# Altium PCB NaiS6202HD_0.7 - Copy.PcbDoc (part 1 of 2)
Units mm, origin at the board's own origin, x right, y up, seen from the top; angles counter-clockwise.
Board outline 60 x 38 mm, 4 copper layers (Top, INT1, GND, Bottom), stack 0.965 mm thick; 148 components, 224 nets, 688 pads, 377 vias.
Unrouted connection lines stored in the file: 231.
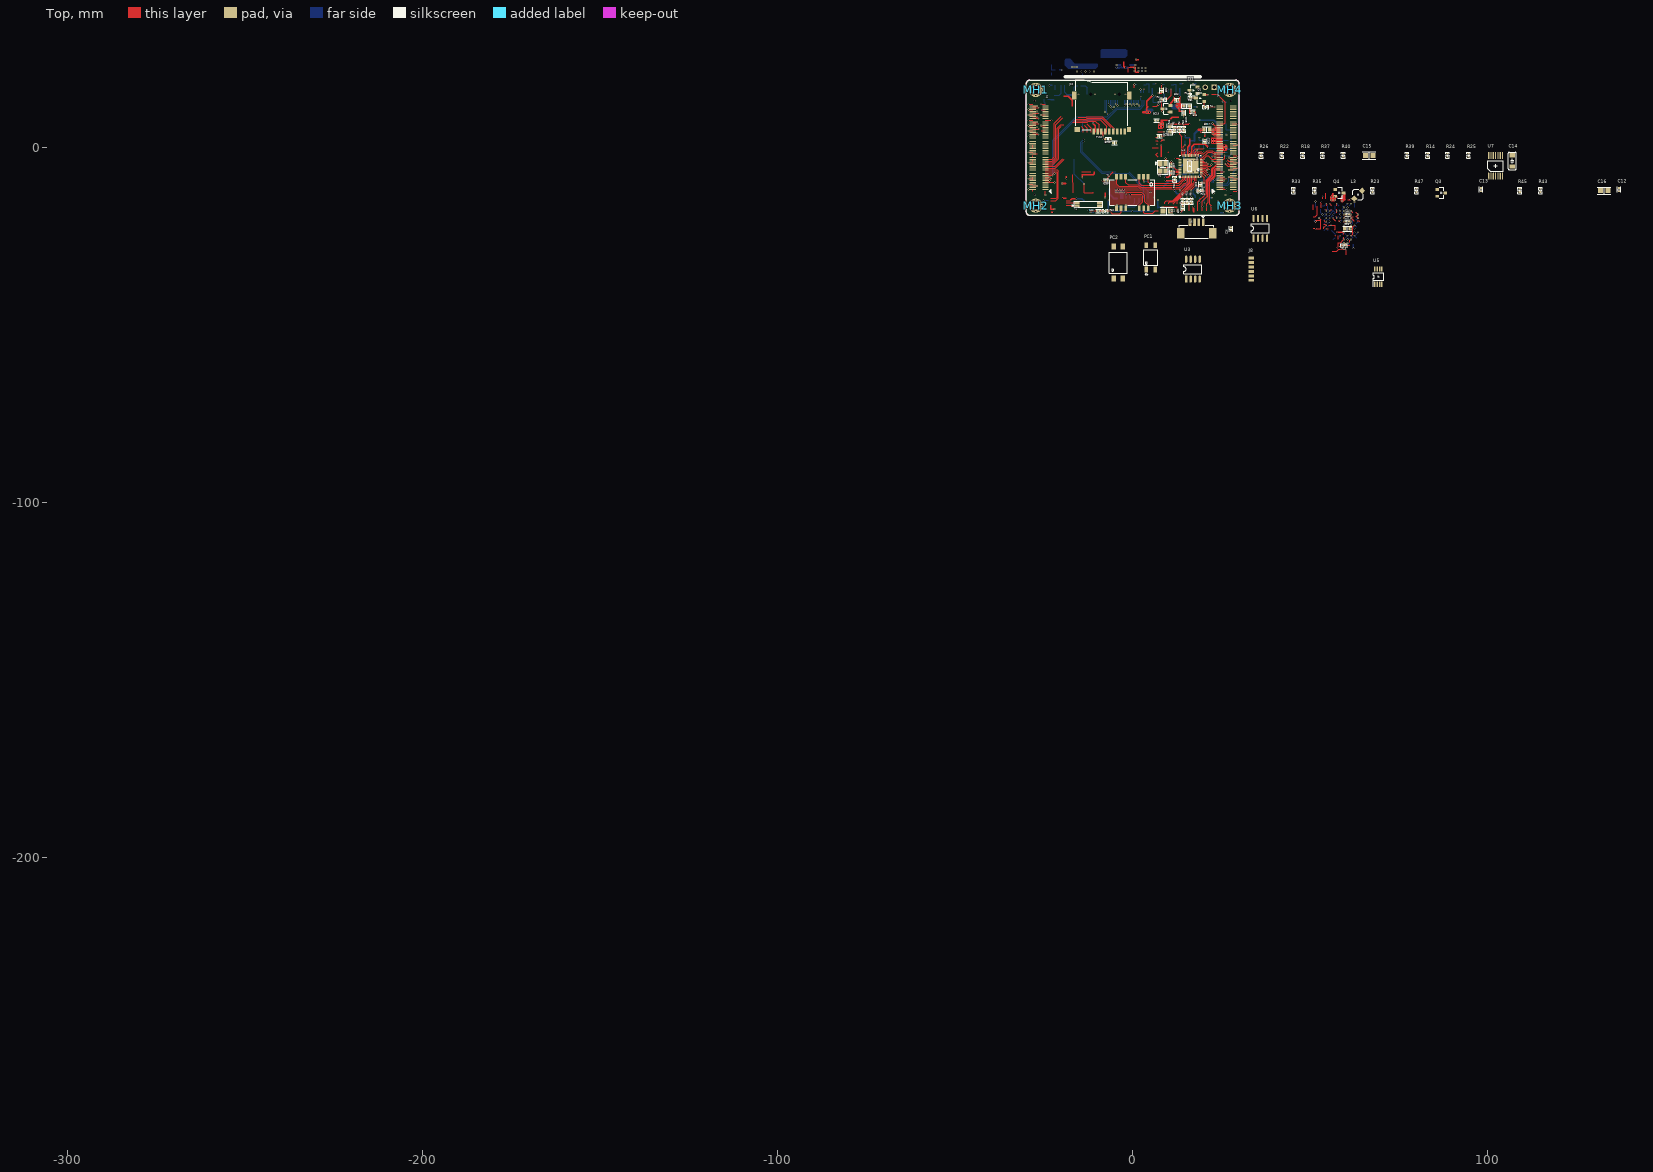
[diagram p0: Top view]
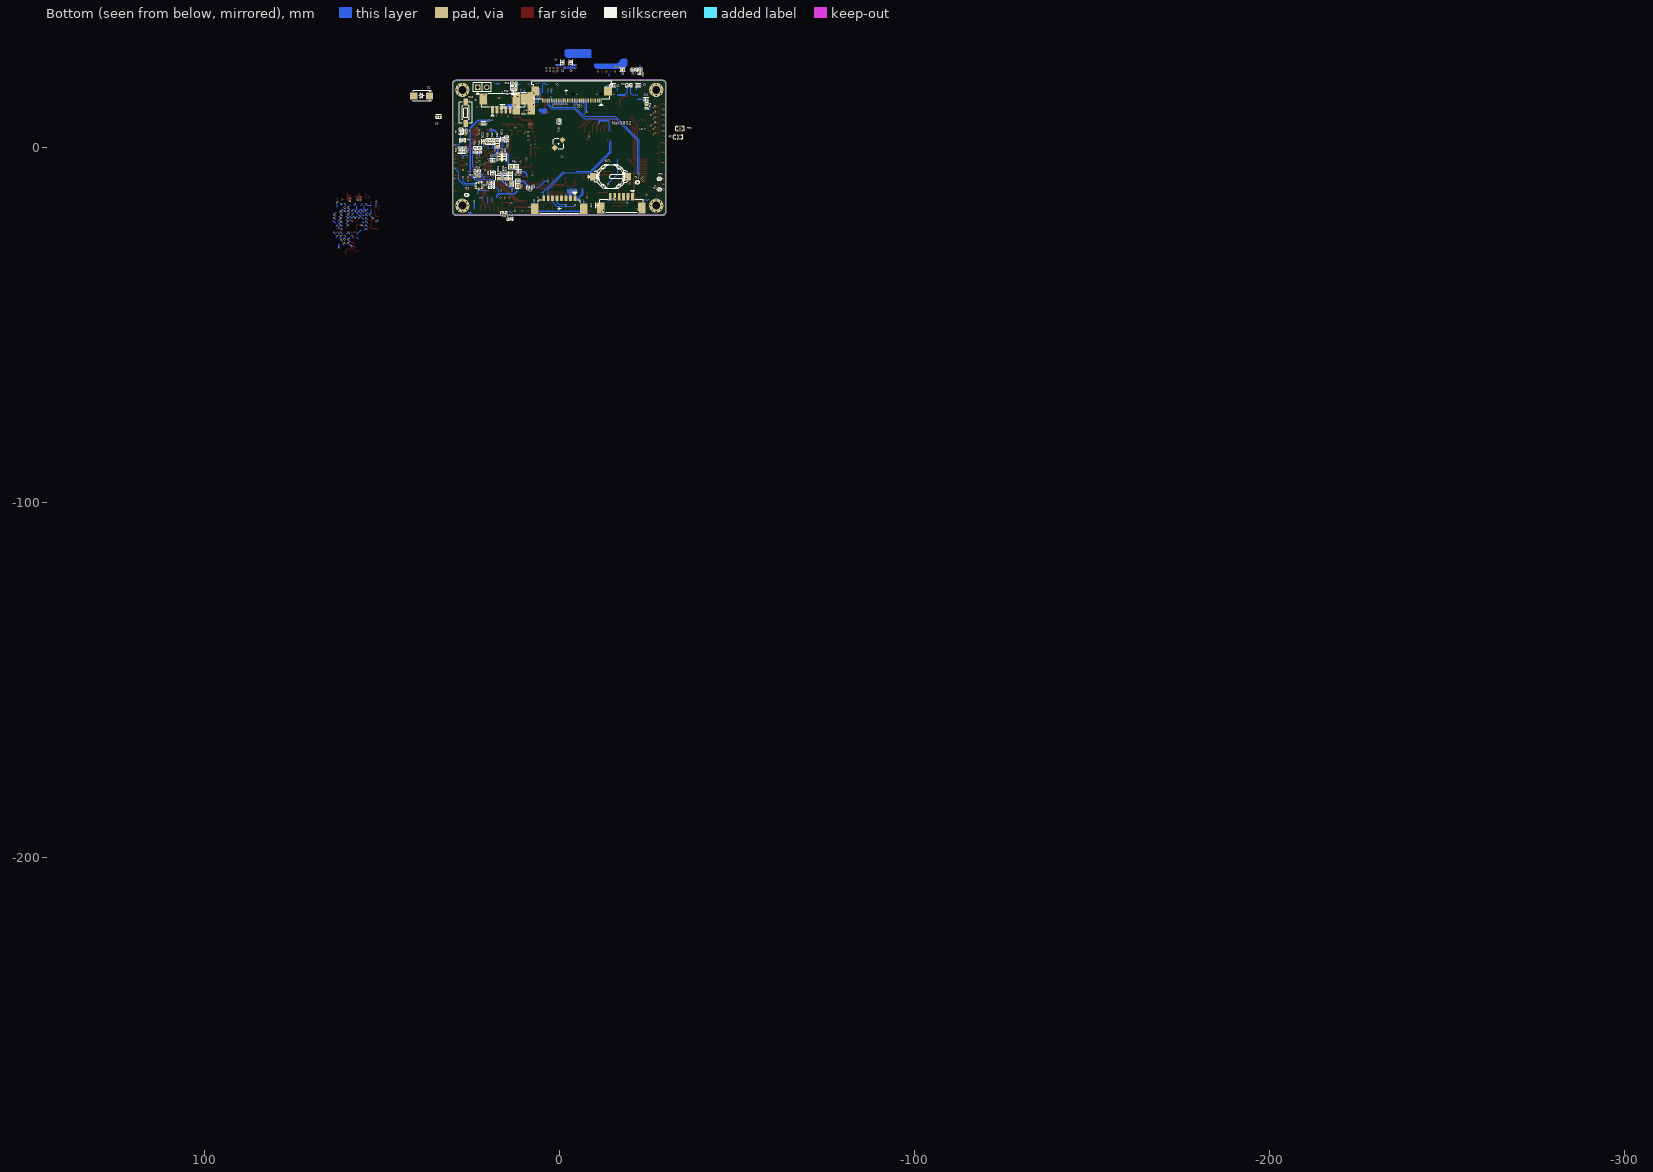
[diagram p1: Bottom view, seen from below]
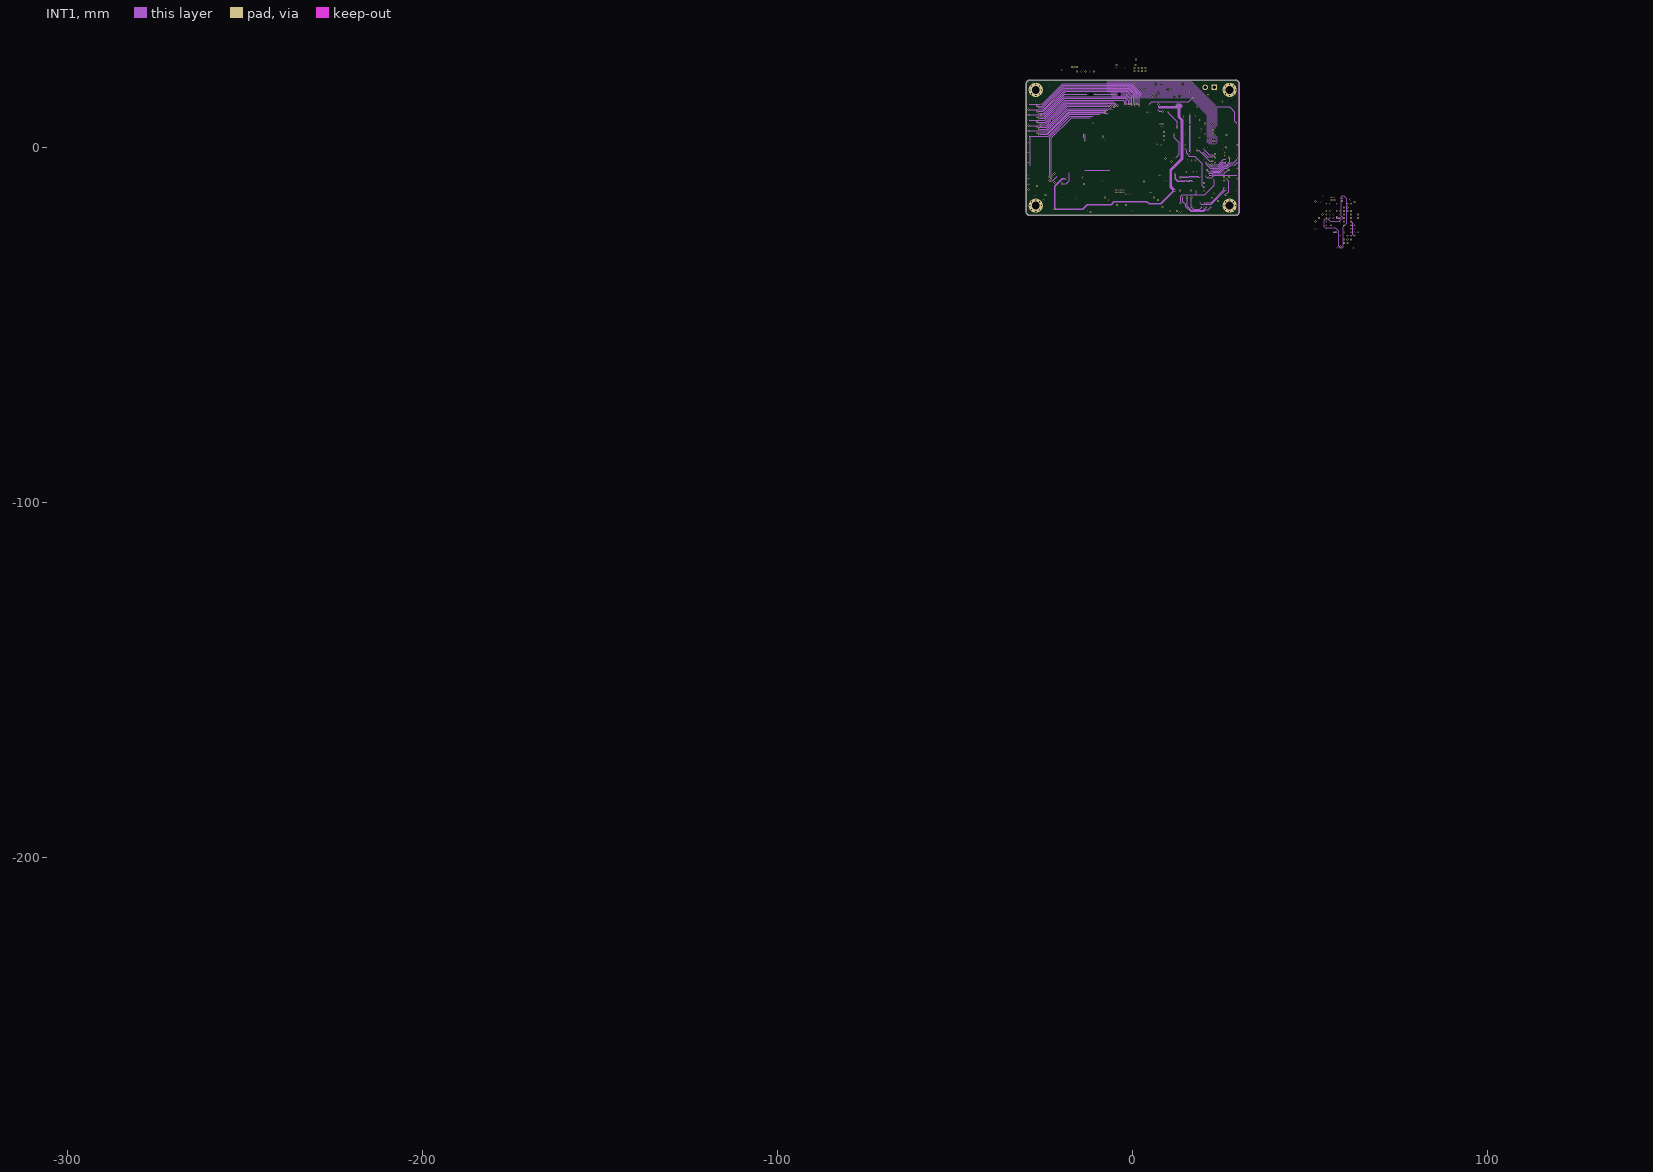
[diagram p2: INT1]
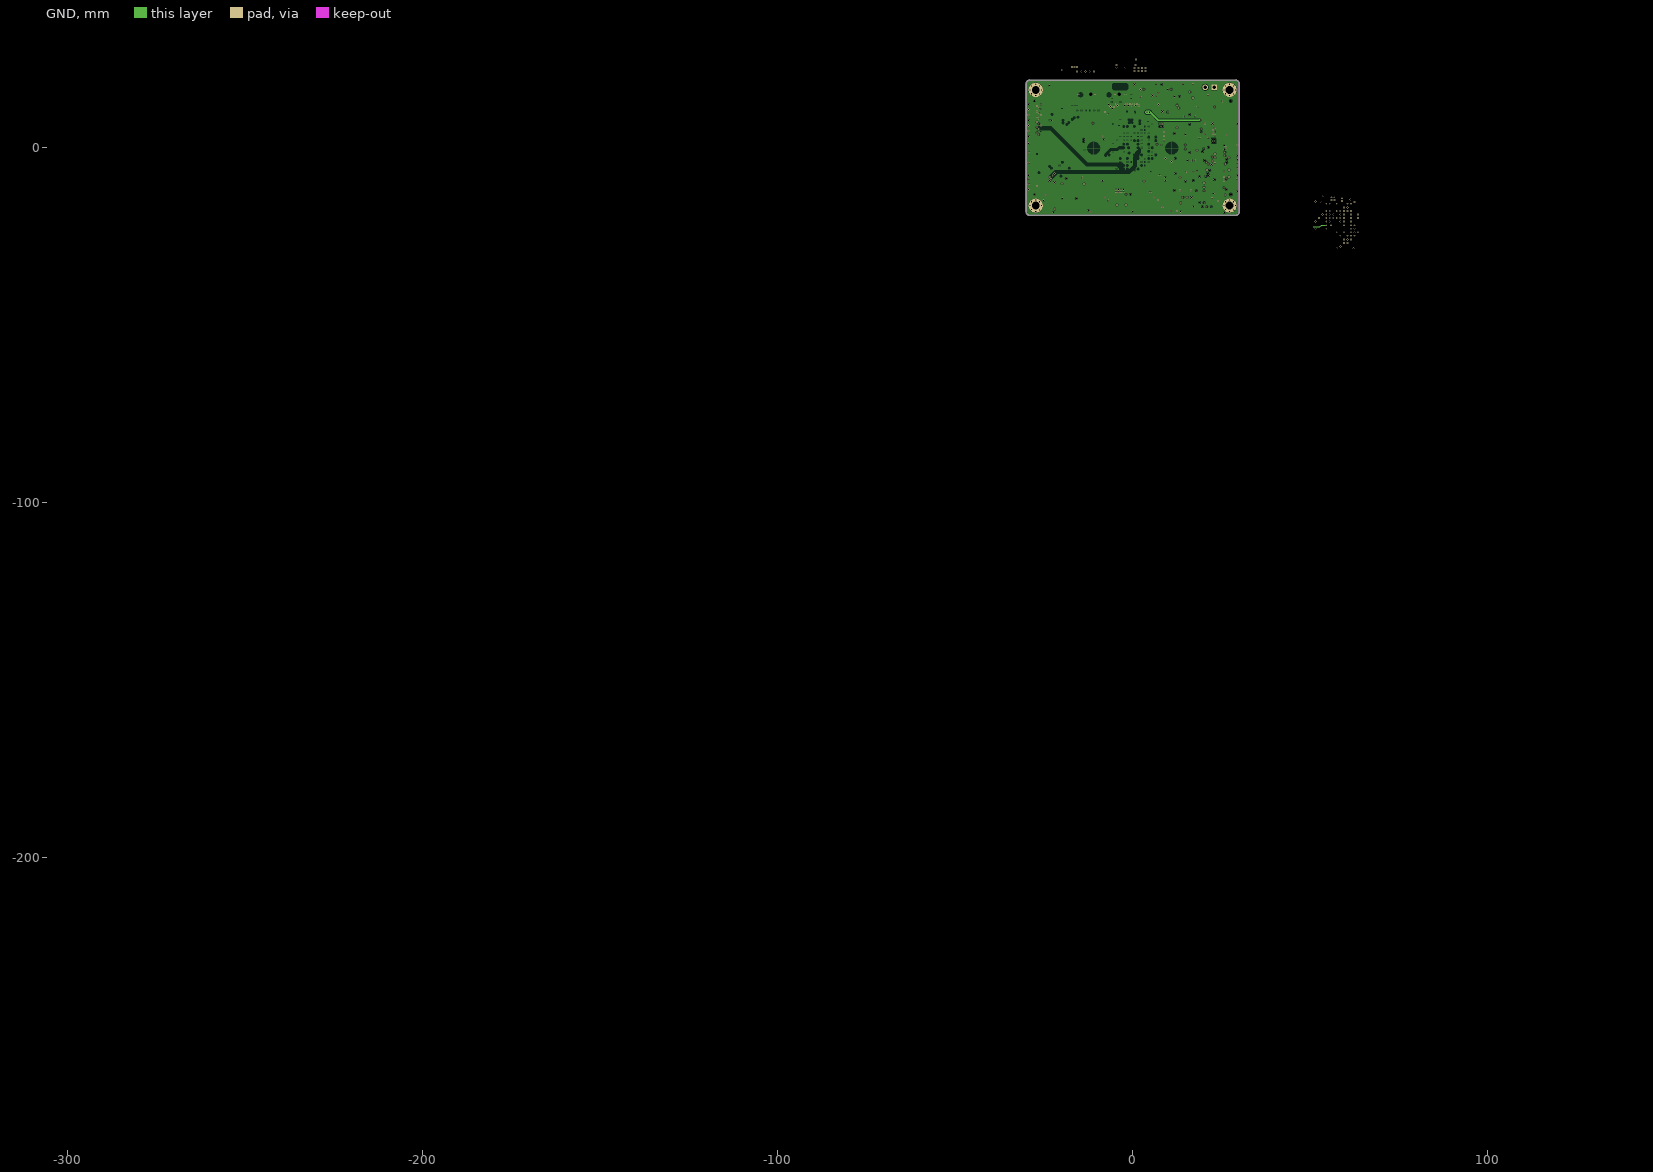
[diagram p3: GND]

## Layer stack, top to bottom
Solder Mask Top: solder mask 0.0102, Solder Resist, Dk 3.5
Top: signal copper 0.0343
Dielectric 1: dielectric 0.254, FR-4, Dk 4.3
INT1: signal copper 0.0343
Dielectric2: dielectric 0.254, FR-4, Dk 4.3
GND: signal copper 0.0343
Dielectric4: dielectric 0.32, FR-4, Dk 4.8
Bottom: signal copper 0.0343
Solder Mask Bottom: solder mask 0.0102, Solder Resist, Dk 3.5

## Board outline
-30,-18 -30,18 cw(c-29,18) -29,19 28.994,19 cw(c28.994,18) 29.994,18 30,18 30,-18 29.994,-18 cw(c28.994,-18) 28.994,-19 -29,-19 cw(c-29,-18)

## Design rules (kind name [scope] priority, off if disabled: settings)
AssemblyTestPointUsage [All] p1 off:
AssemblyTestpoint [All] p1 off: testpointundercomponent=TRUE minsize=1.016 maxsize=2.54 preferedsize=1.524 minholesize=0 maxholesize=1.016 preferedholesize=0.813 testpointgrid=0.025 usegrid=TRUE gridtolerance=0 allowsidetop=TRUE allowsidebottom=TRUE
Clearance Clearance_6 [InNet('+12V') or InNet('N21617464') or InNet('+5.0V')  or InNet('+3.3V') vs IsFill] p1: gap=0.4
Clearance Clearance_4 [InComponent('MH1') OR InComponent('MH2') OR InComponent('MH3') OR InComponent('MH4') or INnet('GND') vs OnLayer('Keep-Out Layer')] p2: gap=0
Clearance Clearance_3 [InComponent('U4') or InComponent('RP1') or InComponent('RP2') or  HasFootprint('CS-0603')] p3: gap=0.127
Clearance Clearance_2 [OnLayer('Keep-Out Layer') vs InNet('GND')] p4: gap=0.1
Clearance Clearance_1 [IsVia] p5: gap=0.1
Clearance [All] p6: gap=0.2
ComponentClearance ComponentClearance_1 [InComponent('J7') or InComponent('J5') or InComponent('J3') or InComponent('U18') or InComponent('U1') or Incomponent('J10') vs InComponent('U19') or InComponent('D2')  or InComponent('L6') or InComponent('L2') or InComponent('LD1') or InComponent('LD2') or InComponent('LD3') or InComponent('LD4') or InComponent('FB11') or InComponent('BC14') or InComponent('U17') or InComponent('OSC1') or InComponent('U11')  or  InComponent('U8') or InComponent('BC25') or InComponent('C24') or InComponent('C31') or InComponent('BC18') or InComponent('R55') or InComponent('C27') or InComponent('BC20') or InComponent('FB12') or InComponent('C25') or InComponent('C26') or InComponent('R56') or InComponent('R20') or InComponent('R19') or InComponent('R53') or InComponent('R54') or InComponent('R21') or InComponent('R18') or InComponent('FB4')  or Incomponent('C35') or Incomponent('TVS1') or InComponent('C36') or InComponent('FB2') or InComponent('BC7')] p1: gap=-10 collisioncheckmode=3 verticalgap=0.254 showdistances=FALSE
ComponentClearance [All] p2: gap=0.01 collisioncheckmode=3 verticalgap=0 showdistances=FALSE
DiffPairsRouting [All] p1 off: maxlimit=0.254 minlimit=0.2 mostfreqgap=0.254 toplayer_prefgap=0.2 toplayer_minwidth=0.2 toplayer_maxwidth=0.381 toplayer_prefwidth=0.254 midlayer1_mingap=0.254 midlayer1_minwidth=0.381 midlayer1_maxwidth=0.381 midlayer1_prefwidth=0.381 midlayer2_mingap=0.254 midlayer2_minwidth=0.381 midlayer2_maxwidth=0.381 midlayer2_prefwidth=0.381 bottomlayer_prefgap=0.2 bottomlayer_minwidth=0.2 bottomlayer_maxwidth=0.381 bottomlayer_prefwidth=0.254 maxuncoupledlength=12.7
FabricationTestPointUsage [All] p1 off: valid=0 allowmultiple=FALSE
FabricationTestpoint [All] p1 off: side=3 testpointundercomponent=TRUE minsize=1.016 maxsize=2.54 preferedsize=1.524 minholesize=0 maxholesize=1.016 preferedholesize=0.813 testpointgrid=0.025 allowsidetop=TRUE allowsidebottom=TRUE usegrid=TRUE gridtolerance=0
FanoutControl Fanout_BGA [IsBGA] p1 off: bgadir=Out bgaviamode=Centered fanoutstyle=Auto fanoutdirection=Alternating viagrid=0.025 // Fanout_BGA (Default Rule)
FanoutControl Fanout_SOIC [IsSOIC] p3 off: bgadir=Out bgaviamode=Centered fanoutstyle=Auto fanoutdirection=Alternating viagrid=0.025 // Fanout_SOIC (Default Rule)
FanoutControl Fanout_Small [(CompPinCount < 5)] p4 off: bgadir=Out bgaviamode=Centered fanoutstyle=Auto fanoutdirection=OutThenIn viagrid=0.025 // Fanout_Small (Default Rule)
FanoutControl Fanout_Default [All] p5 off: bgadir=Out bgaviamode=Centered fanoutstyle=Auto fanoutdirection=Alternating viagrid=0.025 // Fanout_Default (Default Rule)
Height [All] p1 off: minheight=0 maxheight=25.4 prefheight=12.7
HoleSize [All] p1: absolutevalues=TRUE maxlimit=5 minlimit=0.25 maxpercent=80.000 minpercent=20.000
HoleToHoleClearance [All] p1: gap=0.2 allowstackedmicrovias=TRUE
MinimumSolderMaskSliver [All] p1: minsoldermaskwidth=0
PasteMaskExpansion [All] p1 off: expansion=0
PermittedLayers [All] p1 off: toplayerpermitted=TRUE bottomlayerpermitted=TRUE
PlaneClearance [InNet('GND')] p1 off: clearance=0.508
PlaneConnect [All] p1 off: planeconnectstyle=Direct reliefexpansion=0.508 reliefentries=4 reliefconductorwidth=0.254 reliefairgap=0.254
PolygonConnect [All] p1 off: connectstyle=Direct reliefconductorwidth=0.254 reliefentries=4 polygonreliefangle="90 Angle" airgapwidth=0.1
RoutingVias [All] p1: holewidth=0.25 width=0.5 viastyle="Through Hole" minholewidth=0.25 minwidth=0.5 maxholewidth=0.25 maxwidth=0.5
ShortCircuit [All] p1 off: allowed=FALSE
SilkToSilkClearance [All] p1: silktosilkclearance=0
SilkToSolderMaskClearance [IsPad] p1: minsilkscreentomaskgap=0 clearancetoexposedcopper=TRUE
SolderMaskExpansion [All] p1: expansion=0.102
Width Width_1 [(InNet('VDD_3.3V') OR InNet('AVDD') OR InNet('OVDD') OR InNet('DVDD'))] p1: maxlimit=2 minlimit=0.2 preferedwidth=2
Width [All] p2: maxlimit=1 minlimit=0.1 preferedwidth=0.2
9 further rules are at their usual default settings.

## Components (designator, comment, footprint, x,y, rotation, side; value= is the part's Value field where it differs from the comment)
BAT1 "CN048S-0005//SMD_BAT_HOLDER" BAT-CN048S -14.416,-8.163 r90 bottom
BC1 "0.1uF" CS-1005 14.127,-17 r270 top
BC2 "0.1uF" CS-1005 8.173,16.15 r90 top
BC3 "0.1uF" CS-1005 12.4,13.5 r0 top
BC4 "10uF" CS-1608 16.663,-2.553 r270 bottom
BC5 "10uF" CS-1608 15.5,-2.549 r270 bottom
BC6 "0.1uF" CS-1005 16.8,10.2 r0 top
BC7 "0.1uF" CS-1005 13.3,-10.25 r270 bottom
BC8 "0.1uF" CS-1005 18.818,-7.049 r90 bottom
BC9 "10uF" CS-1608 13.9,-7.949 r90 bottom
BC10 "0.1uF" CS-1005 21.3,1.7 r90 bottom
BC11 "0.1uF" CS-1005 20.381,1.827 r90 top
BC12 "0.1uF" CS-1005 18.8,-3.549 r180 bottom
BC13 "0.1uF" CS-1005 16,2.4 r90 bottom
BC14 "0.1uF" CS-1005 11.4,-6.7 r180 bottom
BC15 "10uF" CS-1608 15.068,-7.949 r90 bottom
BC16 "0.1uF" CS-1608 17.068,-7.949 r90 bottom
BC17 "1uF" CS-1608 20.9,5.137 r0 top
BC18 "0.1uF" CS-1005 -5.1,1.4 r0 top
BC19 "0.1uF" CS-1005 6.696,7.727 r180 top
BC20 "0.1uF" CS-1005 7.6,3.3 r180 top
BC21 "0.1uF" CS-1005 14.4,9.8 r90 top
C1 "0.1uF" CS-1005 21.4,6.8 r0 bottom
C2 "1nF/NI" CS-1005 26.4,4.6 r270 bottom
C3 "12pF" CS-1005 -15.085,17.485 r0 bottom
C4 "12pF" CS-1005 -0.894,24 r270 bottom
C5 "0.1uF" CS-1005 -3.3,24 r270 bottom
C6 "0.1uF" CS-1005 12.773,15.483 r180 bottom
C7 "0.1uF" CS-1005 16,11.6 r0 bottom
C8 "0.1uF" CS-1005 -17.85,21.9 r0 bottom
C9 "0.1uF" CS-1005 -22.2,17.564 r180 bottom
C10 "0.1uF" CS-1005 -24.4,13.6 r180 bottom
C11 "0.1uF" CS-1005 -10.8,-16.3 r270 bottom (schematic designator c11)
C12 "0.1uF" CS-1005 137.001,-11.798 r90 top
C13 "10nF" CS-1005 98.102,-11.798 r90 top
C14 "4.7uF-25V-3216" C3216 106.902,-3.698 r90 top
C15 "22uF-6.3V" CS-2012 66.602,-2.198 r0 top
C16 "22uF-6.3V" CS-2012 132.801,-12.098 r0 top
C17 "0.1uF" CS-1005 10.9,-5 r270 top
C18 "0.1uF" CS-1005 10.9,-7 r90 top
C19 "3.3nF" CS-1005 19.143,-10.292 r270 top
C20 "22pF" CS-1005 -7.5,-9.3 r180 top
C21 "22uF-6.3V" CS-2012 9.6,-17.8 r0 top
C22 "0.1uF" CS-1005 -9.7,-17.8 r180 top
C23 "22uF" CS-1608 60.486,-22.8 r0 top
C24 "2.2nF" CS-1005 60.486,-18.8 r0 top
C25 "2.2nF" CS-1005 60.486,-20.8 r0 top
C26 "1nF" CS-1005 27.7,-22.9 r270 top
D1 "BAT54A" SOT-23 17.1,16.2 r180 top
D2 "RB051L-40" SOD-106 38.8,14.6 r180 bottom
D3 "1N4148" SOD-523 34,8.7 r180 bottom
FB1 "220R" LS-1608 15.2,11.8 r0 top
FB2 "220R" LS-1608 11.7,-10.2 r90 bottom
FB3 "220R" LS-1608 17.4,1.2 r270 bottom
FB4 "220R" LS-1608 12.8,-5.349 r180 bottom
J1 "LB222-G100S-BOR" BTB2X50-050-F-SMD 26.37,0 r180 top locked
J2 "LB208-G100P-BOR" BTB2X50-050-M-SMD -26.37,0 r180 top locked
J3 "05003HR-H34E" 05003HR-H34E -2,16 r180 bottom locked
J4 "12505WS-06" 12505WS-6P -17.5,-15.4 r0 bottom
J5 "PH-2PSM//NI" PH-2PSM 21.7,17 r90 bottom
J6 "12505WR-4P" 12505WS-4P 18,-22.5 r0 top
J7 "12505WS-06" 12505WS-6P 15.7,12.2 r180 bottom
J8 "6pin 2.54mm//NI" TP_HEADER_6 33.4,-34.2 r90 top
J9 "12505WR-08" 12505WR-8P 0,-15.7 r180 bottom
J10 "112J-TXAR-R" CON_U-SD -11,4.6 r0 top locked
L1 "CDRH2D14NP-2R2NC" CDRH2D14NP 0.2,1.1 r180 bottom
L2 "CDRH5D18NP-100NC-10uH" CDRH5D18NP 10,12.5 r180 bottom
L3 "CDRH2D14NP-2R2NC" CDRH2D14NP 63.502,-13.198 r0 top
MH1 "4.04pi" VA-2.2 -27.3,16.3 r0 top locked
MH2 "4.04pi" VA-2.2 -27.3,-16.3 r0 top locked
MH3 "4.04pi" VA-2.2 27.3,-16.3 r0 top locked
MH4 "4.04pi" VA-2.2 27.3,16.3 r0 top locked
PC1 "ASSR-4118" ASSR-4118 5.1,-30.9 r0 top
PC2 "PC817" PC817 -4.1,-32.3 r90 top
Q1 "MMBT6427" SOT-23 19,14 r180 top
Q2 "MMBT6427" SOT-23 9.5,11 r180 top
Q3 "MMBT3906" SOT-23 86.902,-12.698 r0 top
Q4 "MMBT6427" SOT-23 58.202,-12.698 r0 top
R1 "2.2K" RS-1005 16.1,14.5 r90 top
R2 "0" RS-1005 8.7,13.6 r0 top
R3 "10K" RS-1005 13.2,5.2 r270 top
R4 "10K" RS-1005 20.6,11.5 r0 top
R5 "10K" RS-1005 11.7,5.2 r270 top
R6 "2.2K" RS-1005 27.2,2.1 r180 bottom
R7 "10K" RS-1005 27.7,4.6 r90 bottom
R8 "0" RS-1005 16.527,-15.073 r270 top
R9 "4.7K" RS-1005 14.127,-15.073 r270 top
R10 "4.7K" RS-1005 15.327,-15.073 r270 top
R11 "4.7K" RS-1005 -19.65,17.564 r180 bottom
R12 "4.7K" RS-1005 -22.794,21.511 r90 bottom
R13 "4.7K" RS-1005 12.773,16.703 r0 bottom
R14 "4.7K" RS-1005 83.102,-2.098 r90 top
R15 "4.7K" RS-1005 12.773,17.923 r180 bottom
R16 "4.7K" RS-1005 -24.645,11.75 r90 bottom
R17 "2.49K, 1%" RS-1005 -21.194,21.911 r180 bottom
R18 "4.7K" RS-1005 47.902,-2.098 r90 top
R19 "4.7K" RS-1005 59.486,-27.5 r0 top
R20 "40.2K" RS-1005 19,-9.9 r0 bottom
R21 "10K" RS-1005 19,-11.1 r180 bottom
R22 "4.7K" RS-1005 42.002,-2.098 r90 top
R23 "2.2K" RS-1005 67.502,-11.998 r90 top
R24 "4.7K" RS-1005 88.702,-2.098 r90 top
R25 "4.7K" RS-1005 94.602,-2.098 r90 top
R26 "0//NI" RS-1005 36.202,-2.098 r90 top
R27 "4.7K" RS-1005 23,-7.9 r180 bottom
R28 "75" RS-1005 23,-6.7 r180 bottom
R29 "75" RS-1005 27.9,-0.8 r270 bottom
R30 "100K" RS-1005 23.6,-0.6 r270 bottom
R31 "45K, 1%" RS-1005 26.7,-0.8 r270 bottom
R32 "10K, 1%" RS-1005 11.836,-8.849 r90 top
R33 "2.2K" RS-1005 45.302,-11.998 r90 top
R34 "150K, 1%" RS-1005 14.8,2.4 r270 bottom
R35 "33.3K, 1%" RS-1005 51.202,-11.998 r90 top
R36 "10K" RS-1005 20,1.7 r270 bottom
R37 "1K" RS-1005 53.502,-2.098 r90 top
R38 "330" RS-1005 18.8,1.7 r270 bottom
R39 "1K" RS-1005 77.302,-2.098 r90 top
R40 "10K" RS-1005 59.302,-2.098 r90 top
R41 "330" RS-1005 19,-12.1 r180 top
R42 "2.2K" RS-1005 22.4,-0.6 r90 bottom
R43 "10K" RS-1005 114.802,-11.998 r90 top
R44 "10K" RS-1005 13.8,-20.1 r0 bottom
R45 "100" RS-1005 109.002,-11.998 r90 top
R46 "10K" RS-1005 15.6,-18.5 r180 bottom
R47 "47" RS-1005 79.902,-11.998 r90 top
R48 "120/NI" RS-1608 10.5,5.2 r270 top
R49 "47" RS-1005 8.3,-11.3 r180 bottom
R50 "10K" RS-1005 14.4,5.2 r90 top
R52 "100" RS-1005 -7.755,-17.8 r0 top
RP1 "10K" RP-4_1005 -33.5,3 r180 bottom
RP2 "10K" RP-4_1005 -34,5.4 r180 bottom
SW1 "SW PB" SWS-CTT-1131U 26.378,9.843 r90 bottom
T1 "TRC41604NL" TRC41604NL -0.1,-12.6 r180 top
TP1 "TPS" TP_0.8_SMD -28.17,-11.75 r90 bottom
TP2 "TPS" TP_0.8_SMD -28.17,-8.75 r90 bottom
TP3 "TPS" TP_0.8_SMD 26.1,-13.3 r90 bottom
TP4 "TPS" TP_0.8_SMD -22,-9.75 r90 bottom
TVS1 "ESD5B5.0ST1G" SOD-523 -0.034,7.425 r270 bottom
TVS2 "ESD5B5.0ST1G" SOD-523 -6.9,2.4 r0 top
U1 "YT8521SH" QFN48_6x6 16.318,-5.149 r90 top
U2 "SGM4574YUQN12G/TR" UTQFN-1.8】1.8-12L 22.6,-10.7 r270 bottom
U3 "MP1482" SOIC-8 17,-34.2 r0 top
U4 "AME5253-AEVADJ" SOT-23-5P 16.068,-5.149 r90 top
U5 "DS1339U-33" TSSOP8-M 69.2,-36.3 r0 top
U6 "MAX3485ESA" SOIC-8 36,-22.7 r0 top
U7 "74HC00MTCX" TSSOP-14 102.202,-5.098 r90 top
Y1 "25MHz-S20P-SX32" SX-32 8.5,-5.5 r90 top
Y2 "32.768KHz-MC-146-7pF" XTS-MC-146 -12.5,-15.9 r0 top

## Footprints (in the part's own frame and the unit in brackets; to place one, negate y for a bottom-side part, rotate by r counter-clockwise, add the part's x,y. Pads: shape width x height; smd on the part's side, far side on the other; paste and mask are expansions set on the pad)
05003HR-H34E [mm]
  rect 0.3x1.1 smd: 1(9.75,-2.65) 2(9.25,-2.65) 3(8.75,-2.65) 4(8.25,-2.65) 5(7.75,-2.65) 6(7.25,-2.65) 7(6.75,-2.65) 8(6.25,-2.65) 9(5.75,-2.65) 10(5.25,-2.65) 11(4.75,-2.65) 12(4.25,-2.65) 13(3.75,-2.65) 14(3.25,-2.65) 15(2.75,-2.65) 16(2.25,-2.65) 17(1.75,-2.65) 18(1.25,-2.65) 19(0.75,-2.65) 20(0.25,-2.65) 21(-0.25,-2.65) 22(-0.75,-2.65) 23(-1.25,-2.65) 24(-1.75,-2.65) 25(-2.25,-2.65) 26(-2.75,-2.65) 27(-3.25,-2.65) 28(-3.75,-2.65) 29(-4.25,-2.65) 30(-4.75,-2.65) 31(-5.25,-2.65) 32(-5.75,-2.65) 33(-6.25,-2.65) 34(-6.75,-2.65)
  rect 2.184x2.413 smd: M1(11.744,-0.006) M2(-8.744,-0.006)
  silkscreen extent -9.75,-4.19 12.75,2.7
12505WR-8P [mm]
  rect 0.8x1.6 smd: 1(4.375,1.45) 2(3.125,1.45) 3(1.875,1.45) 4(0.625,1.45) 5(-0.625,1.45) 6(-1.875,1.45) 7(-3.125,1.45) 8(-4.375,1.45)
  rect 2.1x3 smd: 9(-6.925,-1.45) 10(6.925,-1.45)
  silkscreen extent -5.87,-2.85 5.87,3.12
12505WS-4P [mm]
  rect 0.8x2.1 smd: 1(1.875,1.55) 2(0.625,1.55) 3(-0.625,1.55) 4(-1.875,1.55)
  rect 2.1x3 smd: 5(-4.5,-1.55) 6(4.5,-1.55)
  silkscreen extent -4.87,-2.95 4.87,3.3
12505WS-6P [mm]
  rect 0.8x2.1 smd: 1(-3.145,-1.55) 2(-1.895,-1.55) 3(-0.625,-1.55) 4(0.625,-1.55) 5(1.895,-1.55) 6(3.145,-1.55)
  rect 2.1x3 smd: M1(-5.77,1.55) M2(5.77,1.55)
  silkscreen extent -6.14,-3.31 6.14,2.95
ASSR-4118 [mm]
  rect 1x1.6 smd: 1(-1.27,-3.4) 2(1.27,-3.4) 3(1.27,3.4) 4(-1.27,3.4)
  silkscreen extent -1.95,-4.8 1.95,2.2
BAT-CN048S [mm]
  rect 2.2x1.6 smd: 1(0,4.975) 2(0,-4.975)
  silkscreen extent -3.4,-4.85 3.4,6.25, body extent -3.39,-5.22 3.31,5.18, height 2.8
BTB2X50-050-F-SMD [mm]
  rect 1.8x0.25 smd: 1(1.9,12.25) 2(-1.9,12.25) 3(1.9,11.75) 4(-1.9,11.75) 5(1.9,11.25) 6(-1.9,11.25) 7(1.9,10.75) 8(-1.9,10.75) 9(1.9,10.25) 10(-1.9,10.25) 11(1.9,9.75) 12(-1.9,9.75) 13(1.9,9.25) 14(-1.9,9.25) 15(1.9,8.75) 16(-1.9,8.75) 17(1.9,8.25) 18(-1.9,8.25) 19(1.9,7.75) 20(-1.9,7.75) 21(1.9,7.25) 22(-1.9,7.25) 23(1.9,6.75) 24(-1.9,6.75) 25(1.9,6.25) 26(-1.9,6.25) 27(1.9,5.75) 28(-1.9,5.75) 29(1.9,5.25) 30(-1.9,5.25) 31(1.9,4.75) 32(-1.9,4.75) 33(1.9,4.25) 34(-1.9,4.25) 35(1.9,3.75) 36(-1.9,3.75) 37(1.9,3.25) 38(-1.9,3.25) 39(1.9,2.75) 40(-1.9,2.75) 41(1.9,2.25) 42(-1.9,2.25) 43(1.9,1.75) 44(-1.9,1.75) 45(1.9,1.25) 46(-1.9,1.25) 47(1.9,0.75) 48(-1.9,0.75) 49(1.9,0.25) 50(-1.9,0.25) 51(1.9,-0.25) 52(-1.9,-0.25) 53(1.9,-0.75) 54(-1.9,-0.75) 55(1.9,-1.25) 56(-1.9,-1.25) 57(1.9,-1.75) 58(-1.9,-1.75) 59(1.9,-2.25) 60(-1.9,-2.25) 61(1.9,-2.75) 62(-1.9,-2.75) 63(1.9,-3.25) 64(-1.9,-3.25) 65(1.9,-3.75) 66(-1.9,-3.75) 67(1.9,-4.25) 68(-1.9,-4.25) 69(1.9,-4.75) 70(-1.9,-4.75) 71(1.9,-5.25) 72(-1.9,-5.25) 73(1.9,-5.75) 74(-1.9,-5.75) 75(1.9,-6.25) 76(-1.9,-6.25) 77(1.9,-6.75) 78(-1.9,-6.75) 79(1.9,-7.25) 80(-1.9,-7.25) 81(1.9,-7.75) 82(-1.9,-7.75) 83(1.9,-8.25) 84(-1.9,-8.25) 85(1.9,-8.75) 86(-1.9,-8.75) 87(1.9,-9.25) 88(-1.9,-9.25) 89(1.9,-9.75) 90(-1.9,-9.75) 91(1.9,-10.25) 92(-1.9,-10.25) 93(1.9,-10.75) 94(-1.9,-10.75) 95(1.9,-11.25) 96(-1.9,-11.25) 97(1.9,-11.75) 98(-1.9,-11.75) 99(1.9,-12.25) 100(-1.9,-12.25)
  round 0.5 hole 0.6: M1(-1.25,-13.2) M2(-1.25,13.2)
  silkscreen extent 3.32,11.67 3.92,12.87
BTB2X50-050-M-SMD [mm]
  rect 1.8x0.25 smd: 1(-1.8,12.25) 2(1.8,12.25) 3(-1.8,11.75) 4(1.8,11.75) 5(-1.8,11.25) 6(1.8,11.25) 7(-1.8,10.75) 8(1.8,10.75) 9(-1.8,10.25) 10(1.8,10.25) 11(-1.8,9.75) 12(1.8,9.75) 13(-1.8,9.25) 14(1.8,9.25) 15(-1.8,8.75) 16(1.8,8.75) 17(-1.8,8.25) 18(1.8,8.25) 19(-1.8,7.75) 20(1.8,7.75) 21(-1.8,7.25) 22(1.8,7.25) 23(-1.8,6.75) 24(1.8,6.75) 25(-1.8,6.25) 26(1.8,6.25) 27(-1.8,5.75) 28(1.8,5.75) 29(-1.8,5.25) 30(1.8,5.25) 31(-1.8,4.75) 32(1.8,4.75) 33(-1.8,4.25) 34(1.8,4.25) 35(-1.8,3.75) 36(1.8,3.75) 37(-1.8,3.25) 38(1.8,3.25) 39(-1.8,2.75) 40(1.8,2.75) 41(-1.8,2.25) 42(1.8,2.25) 43(-1.8,1.75) 44(1.8,1.75) 45(-1.8,1.25) 46(1.8,1.25) 47(-1.8,0.75) 48(1.8,0.75) 49(-1.8,0.25) 50(1.8,0.25) 51(-1.8,-0.25) 52(1.8,-0.25) 53(-1.8,-0.75) 54(1.8,-0.75) 55(-1.8,-1.25) 56(1.8,-1.25) 57(-1.8,-1.75) 58(1.8,-1.75) 59(-1.8,-2.25) 60(1.8,-2.25) 61(-1.8,-2.75) 62(1.8,-2.75) 63(-1.8,-3.25) 64(1.8,-3.25) 65(-1.8,-3.75) 66(1.8,-3.75) 67(-1.8,-4.25) 68(1.8,-4.25) 69(-1.8,-4.75) 70(1.8,-4.75) 71(-1.8,-5.25) 72(1.8,-5.25) 73(-1.8,-5.75) 74(1.8,-5.75) 75(-1.8,-6.25) 76(1.8,-6.25) 77(-1.8,-6.75) 78(1.8,-6.75) 79(-1.8,-7.25) 80(1.8,-7.25) 81(-1.8,-7.75) 82(1.8,-7.75) 83(-1.8,-8.25) 84(1.8,-8.25) 85(-1.8,-8.75) 86(1.8,-8.75) 87(-1.8,-9.25) 88(1.8,-9.25) 89(-1.8,-9.75) 90(1.8,-9.75) 91(-1.8,-10.25) 92(1.8,-10.25) 93(-1.8,-10.75) 94(1.8,-10.75) 95(-1.8,-11.25) 96(1.8,-11.25) 97(-1.8,-11.75) 98(1.8,-11.75) 99(-1.8,-12.25) 100(1.8,-12.25)
  round 0.5 hole 0.6: 1(1.25,13.2) 1(1.25,-13.2)
  silkscreen extent -3.47,11.65 -2.88,12.85
C3216 [mm]
  rect 1.2x1.6 smd: 1(-1.6,0) 2(1.6,0)
  silkscreen extent -2.5,-1.1 2.5,1.1
CDRH2D14NP [mm]
  rect 1.3x1.3 smd rot 45: 1(1.1,1.1) 2(-1.1,-1.1)
  Top pour cut-out: -1.484,1.116 -1.504,-0.621 -0.625,-1.5 1.025,-1.5 1.5,-1.025 1.5,0.7 0.7,1.5 -1.1,1.5
  silkscreen extent -1.5,-1.5 1.5,1.5
CDRH5D18NP [mm]
  rect 2.15x6.3 smd: 1(2.075,0) 2(-2.075,0)
  silkscreen extent -0.7,-3 0.7,3
CON_U-SD [mm]
  rect 0.7x1.6 smd: 1(0,0) 2(1.105,0) 3(2.201,0) 4(3.303,0) 5(4.407,0) 6(5.504,0) 7(6.6,0) 8(7.705,0) CD(8.801,0)
  rect 1.1x1.4 smd: 9(10.006,0.499)
  rect 1.6x1.4 smd: 10(-4.596,0.508)
  rect 1.2x2.2 smd: 11(10.012,10.108) 12(-5.497,10.108)
  round 0 hole 1: 13(7.198,10.509)
  round 0.3 hole 1: 14(-0.79,10.513)
  silkscreen extent -5.1,0.48 9.6,14.51
CS-1005 [mm]
  rect 0.5x0.6 smd: 1(-0.45,0) 2(0.45,0)
  silkscreen extent -0.76,-0.51 0.76,0.51
CS-1608 [mil]
  rect 35x40 smd: 1(-31.5,0) 2(31.5,0)
  silkscreen extent -50,-30 50,30
CS-2012 [mil]
  rect 55x55 smd: 1(-42.5,0) 2(42.5,0)
  silkscreen extent -75,-40 75,40
LS-1608 [mil]
  rect 32x32 smd: 1(-30,0) 2(30,0)
  silkscreen extent -55,-25 55,25
PC817 [mm]
  rect 1.8x1.2 smd: 1(-4.506,1.208) 2(-4.506,-1.332) 3(4.494,-1.332) 4(4.494,1.208)
  silkscreen extent -2.98,-2.6 2.86,2.48
PH-2PSM [mil]
  rect 60x60 hole 39.37: 1(0,50)
  round 60 hole 39.37: 2(0,-50)
  silkscreen extent -80,-100 50,100
QFN48_6x6 [mm]
  rrect0% 0.8x0.22 smd: 1(-3,2.2) 2(-3,1.8) 3(-3,1.4) 4(-3,1) 5(-3,0.6) 6(-3,0.2) 7(-3,-0.2) 8(-3,-0.6) 9(-3,-1) 10(-3,-1.4) 11(-3,-1.8) 12(-3,-2.2) 25(3,-2.2) 26(3,-1.8) 27(3,-1.4) 28(3,-1) 29(3,-0.6) 30(3,-0.2) 31(3,0.2) 32(3,0.6) 33(3,1) 34(3,1.4) 35(3,1.8) 36(3,2.2)
  rrect0% 0.22x0.8 smd: 13(-2.2,-3) 14(-1.8,-3) 15(-1.4,-3) 16(-1,-3) 17(-0.6,-3) 18(-0.2,-3) 19(0.2,-3) 20(0.6,-3) 21(1,-3) 22(1.4,-3) 23(1.8,-3) 24(2.2,-3) 37(2.2,3) 38(1.8,3) 39(1.4,3) 40(1,3) 41(0.6,3) 42(0.2,3) 43(-0.2,3) 44(-0.6,3) 45(-1,3) 46(-1.4,3) 47(-1.8,3) 48(-2.2,3)
  rect 4.3x4.3 smd: M1(0,0)
  silkscreen extent -3.22,-3 3,3.22
RP-4_1005 [mm]
  rect 0.406x0.55 smd: 1(-0.8,0.525) 2(-0.8,-0.525) 7(0.8,0.525) 8(0.8,-0.525)
  rect 0.305x0.55 smd: 3(-0.25,0.525) 4(-0.25,-0.525) 5(0.25,0.525) 6(0.25,-0.525)
  silkscreen extent -1.2,-0.6 1.2,0.6
RS-1005 [mm]
  rect 0.5x0.6 smd: 1(-0.45,0) 2(0.45,0)
  silkscreen extent -0.89,-0.51 0.89,0.51
RS-1608 [mil]
  rect 35x40 smd: 1(-31.5,0) 2(31.5,0)
  silkscreen extent -60,-30 60,30
SOD-106 [mm]
  rrect0% 2x2 smd: 1(-2.2,0) 2(2.2,0)
  silkscreen extent -2.3,-1.45 2.7,1.45
SOD-523 [mm]
  rect 0.6x0.7 smd: 1(0.71,0) 2(-0.71,0)
  silkscreen extent -0.8,-0.55 0.8,0.55
SOIC-8 [mil]
  rect 24x80 smd: 1(-76.34,-109.45)
  oval 24x80 smd: 2(-26.34,-109.45) 3(23.66,-109.45) 4(73.66,-109.45) 5(73.66,110.55) 6(23.66,110.55) 7(-26.34,110.55) 8(-76.34,110.55)
  silkscreen extent -101,-49 99,51
SOT-23 [mil]
  rect 42x32 smd: 1(-45.45,37.75) 2(-45.45,-37.35) 3(44.85,0.2)
  silkscreen extent -20,-60 30,60
SOT-23-5P [mm]
  rect 0.5x1.1 smd: 1(-0.95,-1.35) 2(0,-1.35) 3(0.95,-1.35) 4(0.95,1.35) 5(-0.95,1.35)
  silkscreen extent -1.45,-2.65 1.45,0.6
SWS-CTT-1131U [mm]
  rect 2x1.2 smd: 1(-3,0) 2(3,0)
  silkscreen extent -3,-1.8 3,1.8
SX-32 [mm]
  rect 1.4x1.2 smd: 1(1.1,0.75) 2(-1.1,0.75) 3(-1.1,-0.75) 4(1.1,-0.75)
  silkscreen extent -2,-1.5 2,2
TP_0.8_SMD [mm]
  round 0.8 smd: 1(0,0)
  silkscreen extent -0.56,-0.56 0.56,0.56
TP_HEADER_6 [mm]
  rect 0.8x1.6 smd: 1(-3.125,0) 2(-1.875,0) 3(-0.625,0) 4(0.625,0) 5(1.875,0) 6(3.125,0)
TRC41604NL [mm]
  rect 0.76x1.52 smd: 1(-4.436,-4.445) 2(-3.168,-4.445) 3(-1.898,-4.445) 6(1.912,-4.445) 7(3.182,-4.445) 8(4.452,-4.445) 9(4.438,4.445) 10(3.168,4.445) 11(1.898,4.445) 14(-1.912,4.445) 15(-3.182,4.445) 16(-4.452,4.445)
  silkscreen extent -6.35,-3.56 6.35,3.56
TSSOP8-M [mm]
  rect 0.4x1.5 smd: 1(-0.975,-2.15) 2(-0.325,-2.15) 3(0.325,-2.15) 4(0.975,-2.15) 5(0.975,2.15) 6(0.325,2.15) 7(-0.325,2.15) 8(-0.975,2.15)
  silkscreen extent -1.5,-2.88 1.5,1.1
TSSOP-14 [mm] "TSOP, 16-Leads, Body 5x4.4mm, Pitch 0.65mm, IPC Low Density"
  oval 2x0.35 smd: 1(-2.9,1.95) 2(-2.9,1.3) 3(-2.9,0.65) 4(-2.9,0) 5(-2.9,-0.65) 6(-2.9,-1.3) 7(-2.9,-1.95) 8(2.9,-1.95) 9(2.9,-1.3) 10(2.9,-0.65) 11(2.9,0) 12(2.9,0.65) 13(2.9,1.3) 14(2.9,1.95)
  silkscreen extent -1.5,-2.22 1.5,2.23
UTQFN-1.8】1.8-12L [mm]
  rect 0.75x0.2 smd: 1(-0.9,0.2) 2(-0.9,-0.2) 7(0.9,-0.2) 8(0.9,0.2)
  rect 0.2x0.75 smd: 3(-0.6,-0.9) 4(-0.2,-0.9) 5(0.2,-0.9) 6(0.6,-0.9) 9(0.6,0.9) 10(0.2,0.9) 11(-0.2,0.9) 12(-0.6,0.9)
  silkscreen extent -1.3,-0.9 0.9,0.9
VA-2.2 [mm]
  rrect100% 4x4 hole 2.2: 1(0,0)
XTS-MC-146 [mm]
  rect 1.4x0.6 smd: 1(-3.15,-0.42) 2(3.15,-0.42) 3(3.15,0.42) 4(-3.15,0.42)
  silkscreen extent -4.5,-0.9 4,0.9

## Via types
v1: diameter 0.5, hole 0.25, Top to Bottom, tented both sides, 331 vias
v2: diameter 0.5, hole 0.25, Top to Bottom, 46 vias

## Nets (pads, with @x,y where several pads share a name; then routed paths per layer and width w, separated by ;. In a path a pad name is that pad's centre, name@x,y a point inside that pad or via, vN(x,y) a via of type N, cw(c..) or ccw(c..) an arc to the next point about the centre after c; other vN are vias at no path point)
1.8VCORE: J2.14 J2.16 J2.18 R2.2 TP2.1 | length 3.3
  Top w0.2: v1(-29.331,-8.75) J2.16@-28.17,-8.75 ; J2.14@-28.17,-9.25 J2.16@-28.17,-8.75 ; J2.18@-28.17,-8.25 J2.16@-28.17,-8.75
  Bottom w0.2: v1(-29.331,-8.75) TP2.1@-28.17,-8.75
1V8_IO67: J1.68
1V8_IO68: J1.70
1V8_IO72: J1.72
1V8_IO73: J1.74
1V8_IO74: J1.76
1V8_IO82: J1.66
1V8_IO92: J2.59
1V8_IO93: J2.61
1V8_IO94: J2.51
1V8_IO95: J2.53
1V8_IO96: J2.57
1V8_IO104: J2.30
1V8_IO105: J2.32
1V8_IO106: J2.26
1V8_IO107: J2.28
1V8_IO118: J2.19 J3.30 | length 42.6
  Top w0.2: J2.19@-24.57,-7.75 -24.52,-7.8 v2(-22.5,-7.8)
  Bottom w0.2: v2(-22.5,-7.8) -22.5,2.134 -15.934,8.7 -7.1,8.7 -4.5,11.3 1.9,11.3 2.75,12.15 J3.30@2.75,13.35
1V8_IO119: J2.21 J3.31 | length 42.5
  Top w0.2: J2.21@-24.57,-7.25 v2(-22.05,-7.25)
  Bottom w0.2: v2(-22.05,-7.25) -22.05,2.018 -16.018,8.05 -7.184,8.05 -4.334,10.9 2.066,10.9 3.25,12.084 J3.31@3.25,13.35
3.3VCORE: J2.2 J2.4 TP1.1 | length 2.9
  Top w0.2: v1(-29.331,-11.75) J2.4@-28.17,-11.75 J2.2@-28.17,-12.25
  Top w0.4: v1(-29.331,-11.75) v1@-29.306,-11.775
  Bottom w0.2: v1(-29.331,-11.75) TP1.1@-28.17,-11.75
3V3_IO114: J1.11 R43.1 U6.4 U7.1 U7.2
3V3_IO115: J1.9 R45.1
3V3_IO124: J2.9 R39.1
3V3_IO125: J2.7 R37.1
3V3_IO126: J2.5 PC2.4 R40.1
3V3_IO127: J2.3
+1.8V: BC1.1 J8.1 R2.1 R5.2 R9.2 R10.2 R11.2 | length 78.8
  Top w0.3: v1(13.5,-15.523) R9.2@14.127,-15.523 ; BC1.1@14.127,-16.55 R9.2@14.127,-15.523 ; 15.89,-17.7 15.89,-15.552 ; 16.527,-15.523 R9.2@14.127,-15.523
  Top w0.4: v1(4,10) 4,11.3 4.2,11.5 4.2,11.7 ; 4,11.7 4,13.15 v1(5.566,14.716) ; 16.469,-15.498 16.517,-15.45 ; v2(17.9,-12.1) 18.55,-12.1
  Top w0.6: 2.962,10 v1(4,10)
  Top w1: v1(4,10) v1(4.7,10)
  INT1 w0.3: v1(13.5,-15.523) 13.5,-13.7 13.9,-13.3 17.9,-13.3 ; v2(17.9,-12.1) 17.9,-13.3 ; v1(22.993,-8.97) 22.993,-10.603 20.296,-13.3 17.9,-13.3
  GND w0.4: v1(4.7,10) 5,10 7.2,7.8 v1(18.9,7.8)
  GND w1: v1(4,10) v1(4.7,10)
  Bottom w0.2: 22.8,-9.8 22.8,-9.164
  Bottom w0.254: 25.1,2.1 26.85,2.1
  Bottom w0.4: 3.4,10.62 5.32,10.62 ; 3.48,10.9 5.4,10.9 ; 4.2,10.9 4.7,10.4 ; v1(5.566,14.716) 5.566,15.483 5.566,16.703 ; v1(18.9,7.8) 22.83,7.8 25.1,5.53 25.1,-7.6 23.73,-8.97 v1(22.993,-8.97)
  Bottom w1: v1(4,10) v1(4.7,10) 5.32,10.62
+3.3V: BC17.2 BC18.2 C20.1 C21.1 C22.1 C23.1 FB1.1 FB2.1 J3.1 J3.2 J3.3 J6.1 J10.4 L3.2 R20.1 R21.2 R34.2 RP1.2 RP1.4 RP1.6 RP1.8 RP2.2 RP2.4 RP2.6 RP2.8 TVS1.1 U2.1 U5.8 | length 123.4
  Top w0.2: 61.186,-26.55 61.186,-26.1 v1(61.486,-25.8)
  Top w0.3: 53.836,-22.8 53.836,-22.45 v1(54.486,-21.8) 54.286,-21.6 53.836,-21.6
  Top w0.4: -23.05,-16.2 -23.05,-17.2 -23,-17.25 v2(-22,-17.25) ; v1(-18.725,-8.675) -18.725,-8 ; v2(-11.2,6.9) -10.563,6.263 -10.563,4.412 ; 13.15,10.2 v1@13.15,11.05 ; v1(13.2,14.5) 13.2,12.238 13.638,11.8 FB1.1@14.438,11.8 ; 13.212,10.262 14.5,10.262
  INT1 w0.4: v1(-18.725,-8.675) -19.775,-8.675 -22,-10.9 v2(-22,-17.25) -14.05,-17.25 -12.8,-16 -6.1,-16 -5.3,-15.2 4,-15.2 4.6,-15.8 7.9,-15.8 v2(11.7,-12) ; 12.8,11.4 v1(13,11.2)
  INT1 w0.6: 7.4,11.4 12.8,11.4
  INT1 w0.8: v2(11.7,-12) 10.7,-11 10.7,-6.3 13.9,-3.1 13.9,7.738 13,8.638 v1(13,11.2)
  GND w0.3: 50.786,-22.3 52.686,-22.3 53.186,-21.8 v1(54.486,-21.8)
  Bottom w0.2: 17.051,-12.9 17.051,-11.978 17.944,-11.084 R21.2@18.55,-11.084 ; R21.2@18.566,-11.068 18.566,-9.911 18.566,-9.334 18.932,-8.968 22.087,-8.968 22.4,-9.281 U2.1@22.4,-9.8 ; 53.986,-22.3 v1(54.486,-21.8) ; 60.986,-26.3 v1(61.486,-25.8)
  Bottom w0.3: -14.525,4.675 -14,5.2 -14,7.5
  Bottom w0.4: -13.95,7.55 -11.2,7.55 v2(-11.2,6.9) ; FB2.1@11.7,-10.962 v2(11.7,-12) 12.6,-12.9 17.051,-12.9 17.625,-13.474 17.625,-14.058 ; v1(13.2,14.5) 13.2,15.46 ; 13.223,15.46 13.223,16.723
  other v1: -4.7,-12.5 -4,-12.5 -3.3,-12.5 -2.6,-12.5 -4.7,-11.8 -4,-11.8 -3.3,-11.8 -2.6,-11.8 12.5,12
+5.0V: BC16.2 BC19.2 BC20.2 BC21.2 C15.1 C16.1 J1.55 J1.57 J1.59 J1.61 J7.3 L2.2 PC1.1 Q3.2 R1.2 R6.2 R31.1 R36.1 R40.2 R43.2 R44.2 R46.2 U4.1 U4.4 U6.8 U7.14 | length 22.8
  Top w0.2: 6.5,2 6.95,2 7.05,1.9 ; 6.5,3 6.95,3 BC20.2@7.05,3.1 ; 9.15,13.6 9.7,13.6 10.823,14.723 v1(10.823,16.48) ; 62.936,-18.2 62.936,-18.25 v1(63.486,-18.8) 63.486,-18.888 62.974,-19.4 ; 63.049,-19.4 63.449,-19.8 v1(63.486,-19.8)
  Top w0.254: -1.225,21.285 -1.225,22.589 ; -1.179,22.635 -0.675,22.635 ; R1.2@16.1,14.95 v1(16.1,15.7)
  Top w0.4: -0.675,22.635 0.525,22.635 0.675,22.485 0.675,21.285 ; 0.93,21.335 1.775,21.335
  Top w0.6: v1(-19.895,-10.1) -18.879,-10.1
  INT1 w0.3: v1(-19.895,-10.1) -18.7,-10.1 -17.865,-9.265 -17.865,-7
  Bottom w0.2: 10.823,15.43 v1(10.823,16.48) ; 62.986,-20.3 v1(63.486,-19.8) ; 62.986,-19.3 v1(63.486,-18.8) 62.986,-18.3
  Bottom w0.3: -22.794,20.411 -22.794,21.061
  other v1: 22.435,1.53 23.12,1.53 22.435,2.28 23.12,2.28 0.5,21.6 1.6,21.6 2.6,21.6 3.6,21.6 0.5,22.5 1.6,22.5 2.6,22.5 3.6,22.5
+12V: C14.1 C17.1 D2.2 J7.1 R30.1 U3.2 | length 5.6
  Top w0.4: C17.1@10.9,-4.55 v2(10.9,-3.9)
  Bottom w0.2: -19.2,17.564 -19.2,15.679 -18.367,14.846
  Bottom w0.6: -18.367,14.846 -16.482,14.846
ADCOUT_C: J2.60
AVDD33: BC5.1 BC6.1 BC7.1 FB2.2 R26.1 U1.1 U1.12 | length 14.6
  Top w0.2: v1(13.318,-8.374) 13.861,-8.374 13.868,-8.382 ; 18.268,-8.149 v1(18.818,-8.149)
  INT1 w0.4: v1(13.318,-8.374) 15.643,-8.374 15.868,-8.149 v1(18.818,-8.149)
  Bottom w0.2: v1(18.818,-8.149) 18.818,-7.499
  Bottom w0.4: 8.75,-11.3 8.75,-10.85 10.15,-9.45 13.3,-9.45 13.318,-9.433 v1(13.318,-8.374) 13.875,-8.374
AVDDL_1V2: BC12.1 BC13.1 BC14.1 FB4.2 U1.4 U1.9 U1.47 | length 14.3
  Top w0.2: v1(12,-7.249) 12.3,-6.949 U1.47@13.068,-6.949 ; v1(14.9,-9.449) 15.068,-9.282 15.068,-8.149 ; v1(17.068,-9.268) 17.068,-8.149
  INT1 w0.4: v1(12,-7.249) 12,-8.76 12.69,-9.449 v1(14.9,-9.449) 15.919,-9.449 16.1,-9.268 v1(17.068,-9.268)
  Bottom w0.2: v1(17.068,-9.268) 17.068,-8.599
  Bottom w0.3: v1(14.9,-9.449) 14.9,-9.217 15.068,-9.049 15.068,-8.399
  Bottom w0.4: v1(12,-7.249) 12,-6.749 12,-5.387 FB4.2@12.038,-5.349
BCLK_C: J2.63
BOOT_CTL0: J1.79
BOOT_CTL1: D1.2 J1.77 J5.2 | length 12
  Top w0.2: 22.304,15.126 23.756,15.126 26.1,12.782 26.1,7.1 25.75,6.75 J1.77@24.645,6.75
BT_RST_IN: J1.50
BT_UART_RX: J2.22
BT_UART_TX: J2.24
BT_WAKE_IN: J1.62
BT_WAKE_OUT: J1.64
CFG_LED1: R4.2 R27.1 U1.36 | length 8.4
  Top w0.2: 13.868,-2.149 13.868,3.132 13.2,3.8 13.2,4.75 14.4,4.75
CFG_LED2: R7.2 R25.2 U1.37 | length 11.1
  Top w0.2: 10.506,4.75 11.7,4.75 v2(11.7,4) v2@11.7,3.885 ; v2(12,-2.949) U1.37@13.068,-2.949
  INT1 w0.2: v2(11.7,4) 11.7,2.85 13.1,1.45 13.1,-1.849 v2(12,-2.949)
DACIN_C: J2.58
DI_CON0: J4.1 R41.1 R42.1 | length 3.3
  Top w0.2: R41.1@19.45,-12.1 v2(20.1,-12.1)
  Bottom w0.2: v2(20.1,-12.1) 22.2,-12.1 22.4,-11.9 22.4,-11.6
DO_COM_CON: J4.4 PC1.4
DO_CON0: J4.3 PC1.3
DRIVE_WS2812_3V3: J2.13 J7.6 | length 3.9
  Top w0.2: J2.13@-24.57,-9.25 v1@-23.4,-9.25
  INT1 w0.2: v1(-23.4,-9.258) -22.497,-9.258 -21.24,-8
DVDD33: BC2.1 BC3.1 BC4.1 FB1.2 R25.1 R27.2 U1.30 U1.31 | length 23.1
  Top w0.4: 10.5,5.65 10.5,6.2 10.9,6.6 v1(16.063,6.6) ; 16,10.2 FB1.2@16,11.8 ; v1(16.063,9.337) 16.063,10.137
  Top w0.5: 14.4,5.65 14.4,6.5
  Top w0.6: U1.31@16.068,-2.249 v1@16.068,-1.336
  INT1 w0.5: v1(16.063,-1.336) v1(16.063,6.6) v1(16.063,9.337)
  Bottom w0.4: 15.5,-2.099 15.5,-1.899 v1(16.063,-1.336) 16.663,-1.936 BC4.1@16.663,-2.103
DVDD_RGMII: BC8.1 BC9.1 R12.1 R13.1 R15.1 R23.2 R24.2 U1.29 U2.2 | length 20
  Top w0.2: 16.668,-2.149 16.668,-0.5
  Top w0.4: 16.668,-0.5 16.668,0.327 17.367,1.027 20.381,1.027 ; 20.399,1.045 v1(21.3,0.143)
  Bottom w0.2: 21.3,1.25 21.3,0.5 v1(21.3,0.143) 21.593,-0.15 21.95,-0.15 22.4,-0.15 23.6,-0.15 24.12,-0.15 24.37,-0.4 24.37,-5.23 23.45,-6.15 23.45,-6.7 23.45,-7.9
DVDDL: BC10.1 FB3.2 U1.22 | length 6.7
  Top w0.2: U1.22@19.068,-3.749 19.97,-3.749 v1(20.164,-3.555)
  Bottom w0.4: FB3.2@17.4,0.438 17.4,-1.149 19.25,-2.999 19.25,-3.549 ; 19.384,-3.568 19.384,-3.539 v1@20.153,-3.539
DVP_D0: J1.91 J3.18
DVP_D1: J1.94 J3.19
DVP_D2: J1.93
DVP_D3: J1.82
DVP_D4: J1.86
DVP_D5: J1.96
DVP_D6: J1.95
DVP_D7: J1.84
DVP_D8: J1.98
DVP_D9: J1.97
DVP_D10: J1.100
DVP_D11: J1.88
DVP_D12: J1.92
DVP_D13: J1.90
DVP_D14: J1.99
DVP_D15: J1.81
DVP_DEN: J1.87
DVP_HREF: J1.85
DVP_PCLK: J1.89
DVP_VSYNC: J1.83
EPHY_TRCT: C10.1 R26.2 T1.2 T1.7 | length 15.2
  Top w0.2: -7.05,-9.3 -7.05,-8.416 -5.452,-6.818 ; v1(3.168,-9.468) T1.2@3.168,-8.355 ; 56.186,-29.1 57.486,-29.1 57.97,-28.616 59.802,-28.616 60.154,-28.968 60.154,-30.155
  Bottom w0.2: v1@3.154,-9.482 v1(3.168,-9.468) 4.168,-9.468 6,-11.3 7.85,-11.3
ETH_INTB: J1.28 U2.4 | length 10.4
  Top w0.2: J1.28@28.27,-5.75 v1(29.5,-5.75)
  Bottom w0.2: U2.4@23.5,-10.5 26.8,-10.5 28.3,-9 28.3,-6.95 v1(29.5,-5.75)
ETH_RST: J1.18 U2.3 | length 6.3
  Top w0.2: v1(27.1,-8.25) J1.18@28.27,-8.25
  Bottom w0.2: U2.3@23.5,-10.1 26.5,-10.1 27.1,-9.5 v1(27.1,-8.25)
FD_SW: C2.1 R8.2 SW1.1 | length 3.1
  Bottom w0.2: SW1.1@26.4,6.821 C2.1@26.4,5.05 27.7,5.05
FS_C: J2.62